# Altium PCB NewPCB.PcbDoc
Units mil, origin at the board's own origin, x right, y up, seen from the top; angles counter-clockwise.
Board outline 4705 x 2220 mil, 2 copper layers (Top Layer, Bottom Layer); 55 components, 74 nets, 194 pads, 36 vias.
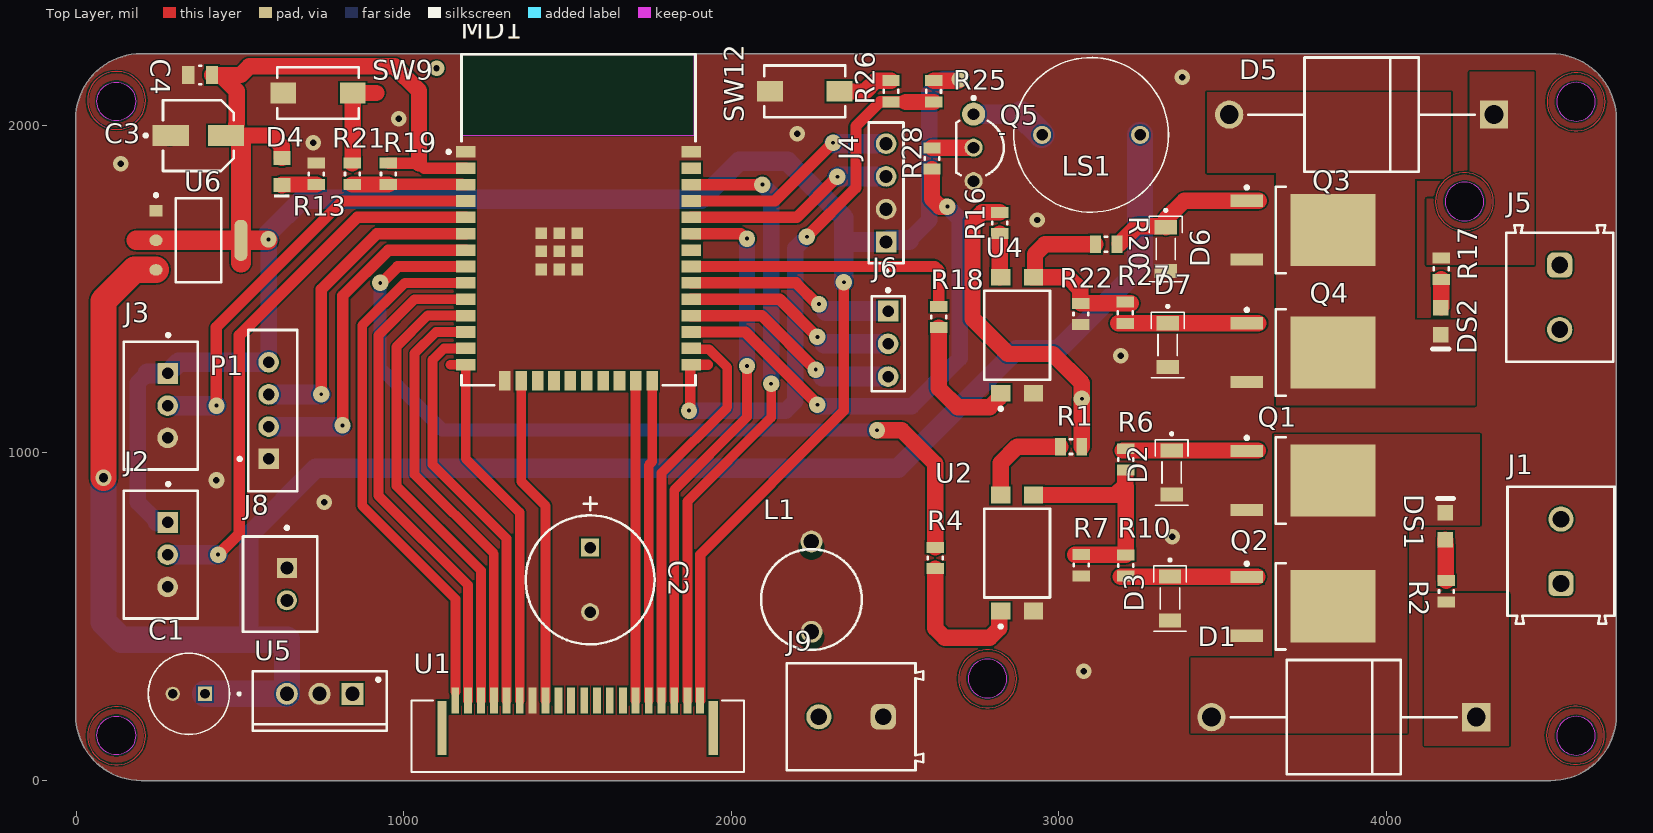
[diagram p0: Top Layer view]
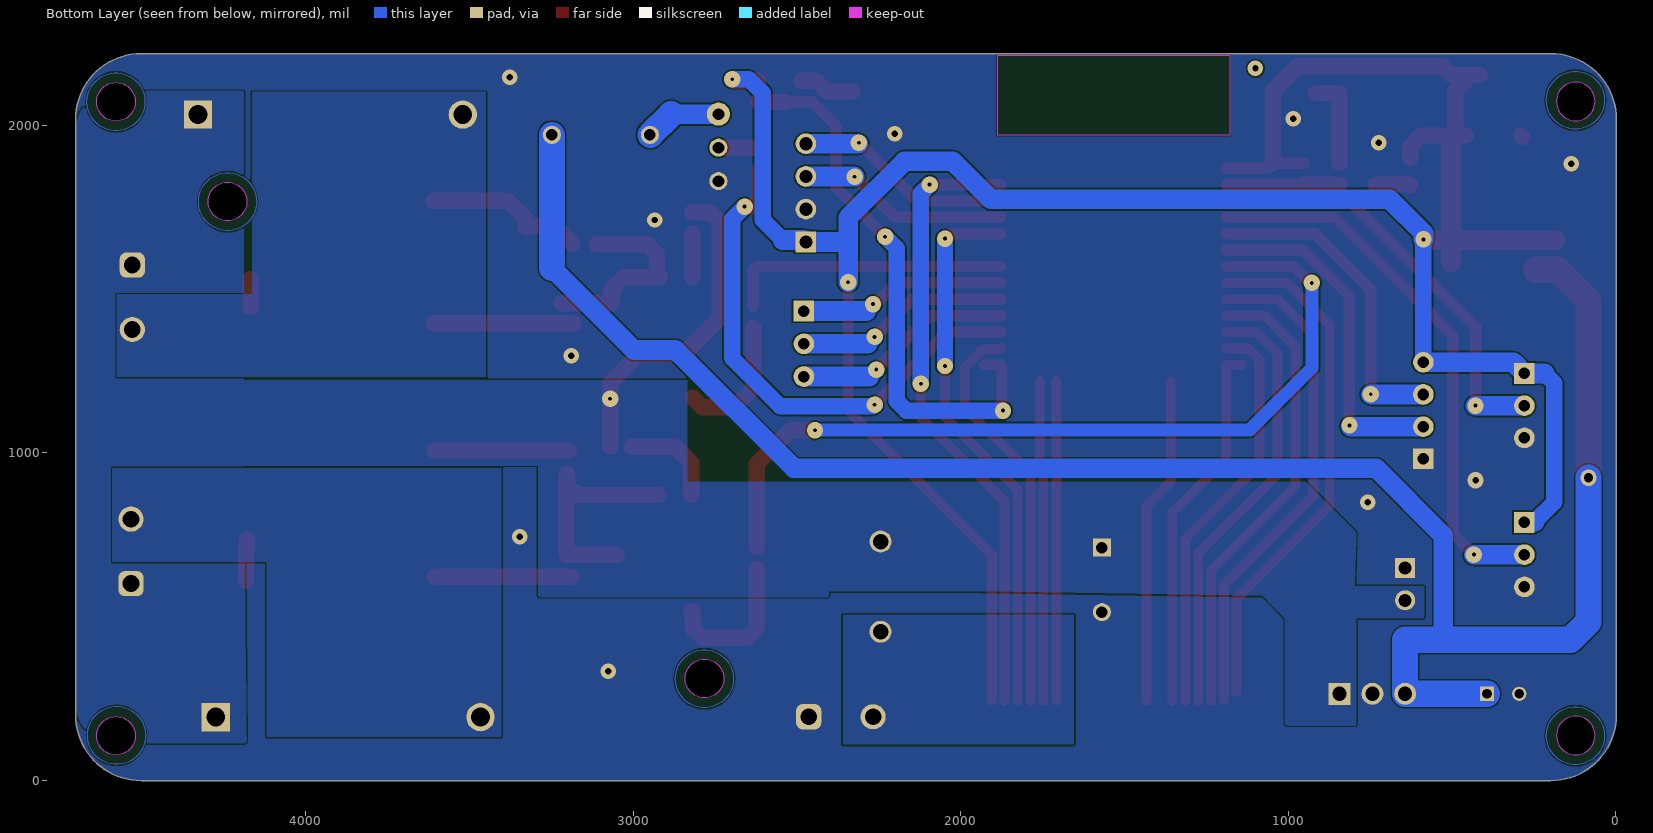
[diagram p1: Bottom Layer view, seen from below]

## Layer stack, top to bottom
Top Solder: solder mask 0.4, Solder Resist, Dk 3.5
Top Layer: signal copper 1.4
Dielectric 1: dielectric 12.6, FR-4, Dk 4.8
Bottom Layer: signal copper 1.4
Bottom Solder: solder mask 0.4, Solder Resist, Dk 3.5

## Board outline
198,-1 4503,-1 ccw(c4503,199) 4703,199 4703,2019 ccw(c4503,2019) 4503,2219 198,2219 ccw(c198,2019) -2,2019 -2,199 ccw(c198,199)
cut-out: 122,2013.94 cw(c122,2073) 62.94,2073 cw(c122,2073) 122,2132.06 cw(c122,2073) 181.06,2073 cw(c122,2073)
cut-out: 4520.96,136 ccw(c4580.02,136) 4580.02,76.94 ccw(c4580.02,136) 4639.07,136 ccw(c4580.02,136) 4580.02,195.06 ccw(c4580.02,136)
cut-out: 4520.94,2072 ccw(c4580,2072) 4580,2012.94 ccw(c4580,2072) 4639.06,2072 ccw(c4580,2072) 4580,2131.06 ccw(c4580,2072)
cut-out: 122,77.96 cw(c122,137.02) 62.94,137.02 cw(c122,137.02) 122,196.07 cw(c122,137.02) 181.06,137.02 cw(c122,137.02)
cut-out: 2723.6,310.65 ccw(c2782.65,310.65) 2782.65,251.6 ccw(c2782.65,310.65) 2841.71,310.65 ccw(c2782.65,310.65) 2782.65,369.71 ccw(c2782.65,310.65)
cut-out: 4180.29,1767.35 ccw(c4239.35,1767.35) 4239.35,1708.29 ccw(c4239.35,1767.35) 4298.4,1767.35 ccw(c4239.35,1767.35) 4239.35,1826.4 ccw(c4239.35,1767.35)

## Design rules (kind name [scope] priority, off if disabled: settings)
Clearance Clearance_1_1 [OnMid vs OnMid] p1: gap=5 ignorepadtopadclearanceinfootprint=FALSE sourcerule=38 cellrowname=All cellrowtype=0 cellcolname=All cellcoltype=0 innerlayers=TRUE
Clearance Clearance_1_2 [(ExistsOnLayer('Top Layer') Or ExistsOnLayer('Bottom Layer')) vs (ExistsOnLayer('Top Layer') Or ExistsOnLayer('Bottom Layer'))] p2: gap=5 ignorepadtopadclearanceinfootprint=FALSE sourcerule=38 cellrowname=All cellrowtype=0 cellcolname=All cellcoltype=0 outerlayers=TRUE
Clearance Clearance_1 [All] p3: gap=5 ignorepadtopadclearanceinfootprint=FALSE ismatrix=TRUE miname0="All Nets" mitype0=2
PlaneConnect [All] p1: planeconnectstyle=Direct reliefexpansion=20 reliefentries=4 reliefconductorwidth=10 reliefairgap=10
PolygonConnect [All] p1: connectstyle=Direct reliefconductorwidth=10 reliefentries=2 polygonreliefangle="90 Angle" airgapwidth=10
RoutingVias [All] p1: holewidth=28 width=50 viastyle="Through Hole" minholewidth=28 minwidth=50 maxholewidth=28 maxwidth=50
SolderMaskExpansion [All] p1: expansion=4 istentingtop=FALSE
UnRoutedNet [All] p1: checkbadconnections=TRUE
Width MaxMinWidth_3 [All] p1: maxlimit=80 minlimit=30 preferedwidth=50 minimp=50.000000 maximp=50.000000 favimp=50.000000
Width MaxMinWidth_1 [InNet('3v3')] p2: maxlimit=80 minlimit=30 preferedwidth=60 minimp=50.000000 maximp=50.000000 favimp=50.000000
Width [All] p3: maxlimit=10 minlimit=10 preferedwidth=10
28 further rules are at their usual default settings.

## Components (designator, comment, footprint, x,y, rotation, side; value= is the part's Value field where it differs from the comment)
C1 "100uF 16v" CAPPRD250W50D630H1120 343.79,264 r180 top
C2 "100uF_35v" PNSC-EEU-EE2G100-2_V 1569,612 r270 top
C3 "10uF" FP-SC-MFG 373,1969 r0 top
C4 "1uF_0805" FP-CC0805-0_85-MFG 378,2154 r180 top value="100 nF"
D1 "6A10-T" FP-R-6-MFG 3871,193 r180 top
D2 "BZV55C5V1" MINIMELF-2 3345,940 r270 top
D3 "BZV55C5V1" MINIMELF-2 3340,555 r270 top
D4 "Red_0805" WL-SMCW_0805_150080xx75000 628,1859 r90 top
D5 "6A10-T" FP-R-6-MFG 3925,2033 r180 top
D6 "BZV55C5V1" MINIMELF-2 3327,1622.13 r270 top
D7 "BZV55C5V1" MINIMELF-2 3333,1329 r270 top
DS1 "HSMG-C170" AVAG-HSMX-C170_V 4181,776 r90 top
DS2 "HSMG-C170" AVAG-HSMX-C170_V 4166.56,1402 r270 top
J1 "691213710002" 691213710002 4534,699 r90 top
J2 "M_Speed1" FP-B3B-XH-A_LF_SN-MFG 258,689 r270 top
J3 "M_Speed2" FP-B3B-XH-A_LF_SN-MFG 258,1144 r270 top
J4 "4x1_Female_Header" FP-2212S-04SG-85-MFG 2473,1794 r90 top
J5 "691213710002" 691213710002 4530,1475 r270 top
J6 "87224-3" FP-87224-3-MFG 2479,1333 r270 top
J8 "JST 2" FP-B2B-XH-A_LF_SN-MFG 622.33,598.82 r270 top
J9 "691213710002" 691213710002 2366,194 r180 top
L1 "744772331" WE-TI-L 2245,552 r90 top
LS1 "CMI-1275C-050" CUI_CMI-1275C-050 3099,1971 r180 top
MD1 "ESP32-WROOM-32D (8MB)" FP-ESP32-WROOM-32D_8MB-MFG 1533.51,1711.91 r0 top
P1 "Ball feeder" JST-B4B-EH-A_V 587.5,1129 r90 top
Q1 "NCE40H12K" INF-PG-TO252-3-313_N 3745.78,915.5 r0 top
Q2 "NCE40H12K" INF-PG-TO252-3-313_N 3745.78,531.25 r0 top
Q3 "NCE40H12K" INF-PG-TO252-3-313_N 3745.78,1680.25 r0 top
Q4 "NCE40H12K" INF-PG-TO252-3-313_N 3745.78,1306.25 r0 top
Q5 "BC547BZL1G" ONSC-TO-92-3-29-11_AM_BL 2740,1932 r270 top
R1 "3.3k" RESC2013X50X30LL20T20 3038,1019 r0 top
R2 "4.7k" RESC2013X50X30LL20T20 4184,577 r270 top
R4 "1k" RESC2013X50X30LL20T20 2623,679 r270 top
R6 "100" RESC2013X50X30LL20T20 3205,980 r90 top
R7 "10k" RESC2013X50X30LL20T20 3069,657 r90 top
R10 "100" RESC2013X50X30LL20T20 3205,656 r270 top
R13 "100" RESC2013X50X30LL20T20 733.09,1852 r270 top
R16 "3.3K" RESC2013X50X30LL20T20 2820,1702 r90 top
R17 "4.7k" RESC2013X50X30LL20T20 4168,1562 r90 top
R18 "1K" RESC2013X50X30LL20T20 2634,1415 r270 top
R19 "12k" RESC2013X50X30LL20T20 953,1852 r270 top
R20 "100" RESC2013X50X30LL20T20 3145,1637 r0 top
R21 "470" RESC2013X50X30LL20T20 843.05,1852 r270 top
R22 "10K" RESC2013X50X30LL20T20 3068,1424 r90 top
R25 "12k" RESC2013X50X30LL20T20 2618,2104 r270 top
R26 "470" RESC2013X50X30LL20T20 2488,2104 r270 top
R27 "100" RESC2013X50X30LL20T20 3203,1428 r270 top
R28 "220" RESC2013X50X30LL20T20 2613,1899 r90 top
SW9 "[3x6x2.5mm] SMD" FP-EVQ-PE105K-MFG 738,2099 r180 top
SW12 "[3x6x2.5mm] SMD" FP-EVQ-PE105K-MFG 2224.3,2104 r180 top
U1 "SFW20R-2STE1LF" FCI_SFW20R-2STE1LF 1531,352 r180 top
U2 "LTV-817S" LTST-LTV-817S-4_V 2873,694 r90 top
U4 "LTV-817S" LTST-LTV-817S-4_V 2873,1359 r90 top
U5 "L7812CV" TO220 743,264 r180 top
U6 "AMS1117-3.3" FP-AMS1117-IPC_C 373,1649 r0 top

## Footprints (in the part's own frame and the unit in brackets; to place one, negate y for a bottom-side part, rotate by r counter-clockwise, add the part's x,y. Pads: shape width x height; smd on the part's side, far side on the other; paste and mask are expansions set on the pad)
691213710002 [mm] "5,00mm - modular - green - Horizontal entry with rising cage clamp -  10,0mm height - 02p"
  rrect50% 1.95x1.95 hole 1.3: 1(-2.5,0)
  round 1.95 hole 1.3: 2(2.5,0)
  silkscreen extent -5.6,-4.15 5,4.15, body extent -5.6,-4.15 5,4.15, height 10.05
AVAG-HSMX-C170_V [mm] "SMD, 2-Leads, Body 2x1.25mm, Height 0.8mm"
  rect 1.2x1.2 smd: 1(-1.05,0) 2(1.05,0)
  silkscreen extent 2.15,-0.63 2.15,0.63, body extent -1,-0.63 1,0.63, height 0.8
CAPPRD250W50D630H1120 [mm]
  round 1.1 hole 0.75: N(1.25,0)
  rect 1.1x1.1 hole 0.75: P(-1.25,0)
  silkscreen extent -4,-3.15 3.15,3.15, body extent -3.15,-3.15 3.15,3.15, height 11.2
CUI_CMI-1275C-050 [mm]
  round 1.408 hole 0.9: N(3.8,0) P(-3.8,0)
  silkscreen extent -6,-6 6,6
FCI_SFW20R-2STE1LF [mil]
  rect 24x79 smd: 1(374,108) 2(335,108) 3(295,108) 4(256,108) 5(217,108) 6(177,108) 7(138,108) 8(98,108) 9(59,108) 10(20,108) 11(-20,108) 12(-59,108) 13(-98,108) 14(-138,108) 15(-177,108) 16(-217,108) 17(-256,108) 18(-295,108) 19(-335,108) 20(-374,108)
  rect 28x165 smd: 21(-414,192) 22(414,192)
  silkscreen extent -508,108 508,326
FP-2212S-04SG-85-MFG [mm]
  rect 1.6x1.6 hole 1.02 paste-2539.97 mask+0: 1(-3.81,0)
  round 1.6 hole 1.02 paste-2539.97 mask+0: 2(-1.27,0) 3(1.27,0) 4(3.81,0)
  silkscreen extent -6.18,-1.35 5.46,1.35, body extent -5.56,-1.45 5.56,1.45, height 0.25
FP-87224-3-MFG [mm]
  rect 1.6x1.6 hole 0.889 paste-2539.97 mask+0: 1(-2.54,0)
  round 1.6 hole 0.889 paste-2539.97 mask+0: 2(0,0) 3(2.54,0)
  silkscreen extent -4.27,-1.27 3.67,1.27, body extent -3.77,-1.37 3.77,1.37, height 0.25
FP-AMS1117-IPC_C [mm]
  rect 1.004x0.872 smd paste+0 mask+0: 1(-3.295,2.29)
  rrect100% 1.004x0.872 smd paste+0 mask+0: 2(-3.295,0) 3(-3.295,-2.29)
  rrect87% 1.004x3.182 smd paste+0 mask+0: 4(3.295,0)
  silkscreen extent -3.42,-3.25 1.75,3.62, body extent -3.9,-3.35 3.9,3.35, height 0.25
FP-B2B-XH-A_LF_SN-MFG [mm]
  rect 1.55x1.55 hole 1 paste-2539.97 mask+0: 1(-1.25,0.525)
  round 1.55 hole 1 paste-2539.97 mask+0: 2(1.25,0.525)
  silkscreen extent -4.5,-2.88 3.7,2.88, body extent -3.8,-2.98 3.8,2.98, height 0.25
FP-B3B-XH-A_LF_SN-MFG [mm]
  rect 1.6x1.6 hole 0.9 paste-2539.97 mask+0: 1(-2.5,0.525)
  round 1.6 hole 0.9 paste-2539.97 mask+0: 2(0,0.525) 3(2.5,0.525)
  silkscreen extent -5.6,-2.88 4.95,2.88, body extent -5.05,-2.98 5.05,2.98, height 0.25
FP-CC0805-0_85-MFG [mm]
  rect 0.95x1.4 smd paste+0 mask+0: 1(-0.925,0) 2(0.925,0)
  silkscreen extent -0.08,-0.72 0.08,0.72, body extent -1.6,-1.05 1.6,1.05, height 0.25
FP-ESP32-WROOM-32D_8MB-MFG [mm]
  rect 1.5x0.9 smd paste+0 mask+0: 1(-8.75,5.26) 2(-8.75,3.99) 3(-8.75,2.72) 4(-8.75,1.45) 5(-8.75,0.18) 6(-8.75,-1.09) 7(-8.75,-2.36) 8(-8.75,-3.63) 9(-8.75,-4.9) 10(-8.75,-6.17) 11(-8.75,-7.44) 12(-8.75,-8.71) 13(-8.75,-9.98) 14(-8.75,-11.25) 25(8.75,-11.25) 26(8.75,-9.98) 27(8.75,-8.71) 28(8.75,-7.44) 29(8.75,-6.17) 30(8.75,-4.9) 31(8.75,-3.63) 32(8.75,-2.36) 33(8.75,-1.09) 34(8.75,0.18) 35(8.75,1.45) 36(8.75,2.72) 37(8.75,3.99) 38(8.75,5.26)
  rect 0.9x1.5 smd paste+0 mask+0: 15(-5.71,-12.5) 16(-4.44,-12.5) 17(-3.17,-12.5) 18(-1.9,-12.5) 19(-0.63,-12.5) 20(0.64,-12.5) 21(1.91,-12.5) 22(3.18,-12.5) 23(4.45,-12.5) 24(5.72,-12.5)
  rect 0.9x0.9 smd paste+0 mask+0: 39(-2.9,-3.86) 39(-2.9,-2.46) 39(-2.9,-1.06) 39(-1.5,-3.86) 39(-1.5,-2.46) 39(-1.5,-1.06) 39(-0.1,-3.86) 39(-0.1,-2.46) 39(-0.1,-1.06)
  Keep-Out Layer region: -9,6.56 9,6.56 9,12.75 -9,12.75
  Keep-Out Layer region: -9,6.56 9,6.56 9,12.75 -9,12.75
  silkscreen extent -10.2,-12.83 9.08,12.83, body extent -9.6,-13.35 9.6,12.93, height 0.25
FP-EVQ-PE105K-MFG [mm]
  rect 2x1.6 smd paste+0 mask+0: A(-2.7,0) B(2.7,0)
  silkscreen extent -3.15,-2 3.15,2, body extent -3.8,-2.1 3.8,2.1, height 0.25
FP-R-6-MFG [mm]
  rect 2.2x2.2 hole 1.45 paste-2539.97 mask+0: 1(-10.27,0)
  round 2.2 hole 1.45 paste-2539.97 mask+0: 2(10.27,0)
  silkscreen extent -8.77,-4.43 8.77,4.43, body extent -11.47,-4.65 11.47,4.65, height 0.25
FP-SC-MFG [mm]
  rect 2.8x1.6 smd paste+0 mask+0: 1(-2.15,0) 2(2.15,0)
  silkscreen extent -4.22,-2.75 2.75,2.75, body extent -3.8,-3 3.8,3, height 0.25
INF-PG-TO252-3-313_N [mm] "DPAK, 3-Leads, Body 6.5x6.12mm, Pitch 2.28mm, IPC Medium Density"
  rect 2.55x0.95 smd: 1(-4.35,2.28) 3(-4.35,-2.28)
  rect 6.6x5.6 smd: 2(2.35,0)
  silkscreen extent -4.47,-3.35 -1.35,3.43, body extent -2.1,-3.32 4.12,3.32, height 2.35
JST-B4B-EH-A_V [mm] "Header, 4-Leads, Body 12.5x3.8mm, Pitch 2.5mm"
  rect 1.6x1.6 hole 0.9: 1(-3.75,0)
  round 1.6 hole 0.9: 2(-1.25,0) 3(1.25,0) 4(3.75,0)
  silkscreen extent -6.25,-2.2 6.25,2.37, body extent -6.25,-2.2 6.25,1.6, height 6
LTST-LTV-817S-4_V [mm] "SMD, 4-Leads, Body 7x5.1mm, Pitch 2.54mm"
  rect 1.3x1.5 smd: 1(-4.5,1.27) 2(-4.5,-1.27) 3(4.5,-1.27) 4(4.5,1.27)
  silkscreen extent -5.82,-2.55 3.45,2.55, body extent -3.5,-2.55 3.5,2.55, height 4.4
MINIMELF-2 [mm]
  rect 1.11x1.73 smd: A(1.705,0) C(-1.705,0)
  silkscreen extent -3.1,-1.27 2.54,1.27
ONSC-TO-92-3-29-11_AM_BL [mm] "TO, 3-Leads, Body Dia 4.7mm, Pitch 2.6mm"
  round 1.8 hole 0.9: 1(-2.6,0)
  round 1.4 hole 0.9: 2(0,0) 3(2.6,0)
  silkscreen extent -3.97,-1.34 2.13,2.35, body extent -2.84,-1.34 2.84,2.35, height 5.33
PNSC-EEU-EE2G100-2_V [mm] "Through-hole, 2-Leads, Base 10x10mm, Height 22mm"
  rect 1.4x1.4 hole 0.9: 1(-2.5,0)
  round 1.4 hole 0.9: 2(2.5,0)
  silkscreen extent -6.4,-5 5,5, body extent -5,-5 5,5, height 22
RESC2013X50X30LL20T20 [mm] "Chip Resistor, 2-Leads, Body 2.00x1.25mm, IPC High Density"
  rect 0.85x1.35 smd: 1(-0.825,0) 2(0.825,0)
  silkscreen extent -0.1,-0.58 0.1,0.58, body extent -1.1,-0.72 1.1,0.72, height 0.5
TO220 [mm] "TO, Thru-Hole, Vertical, Heatsink Mounted; 3 In-Line Leads; Pitch 2.54 mm"
  rect 1.7x1.7 hole 1.1: 1(-2.54,0)
  round 1.7 hole 1.1: 2(0,0) 3(2.54,0)
  silkscreen extent -5.2,-1.75 5.2,2.85, body extent -5.25,-1.8 5.25,2.9, height 19.7
WE-TI-L [mm] "THT Inductor, 2-Leads, Body 8,0  mm"
  round 1.7 hole 1.2: 1(-2.5,0) 2(4.5,0)
  silkscreen extent -3.9,-3.9 3.9,3.9, body extent -3.9,-3.9 3.89,3.9, height 9.5
WL-SMCW_0805_150080xx75000 [mm] "SMD Mono-color Chip LED, body 2.0x1.25mm"
  rect 1.1x1.3 smd: 1(-1.05,0) 2(1.05,0)
  silkscreen extent -2,-0.6 -1.8,0.6, body extent -1,-0.63 1,0.62, height 0.7

## Part data
C1: library part EEUFC1C101H, "Cap Aluminum Lytic 100uF 16V 20% (6.3 X 11.2mm) Radial 2.5mm 290mA 1000h 105C Automotive Ammo", Package="RADIAL-2 Panasonic", Availability="In Stock", Check_prices=https://www.snapeda.com/parts/EEU-FC1C101H/Panasonic/view-part/2305507/?ref=eda, MF=Panasonic, MP=EEU-FC1C101H, Price=None, Purchase-URL=https://pricing.snapeda.com/search/part/EEU-FC1C101H/?ref=eda, SnapEDA_Link=https://www.snapeda.com/parts/EEU-FC1C101H/Panasonic/view-part/2305507/?ref=snap
C2: library part CMP-0736-00002-1, "Aluminum Electrolytic Capacitor, 10 uF +/- 20%, 400 V, -25 to 105 degC, 2-Pin 10 x 10 x 22 mm Through-hole, RoHS, Tape and Reel", Capacitance Tolerance="+/- 20%", Manufacturer=Panasonic, PartNumber=EEU-EE2G100, Rated Voltage="400 V", Ripple Current="430 mA", Temp. Range="-25 to 105 degC", Cap.="10 uF", ComponentLink1Description="Manufacturer URL", ComponentLink1URL=http://industrial.panasonic.com/, ComponentLink2Description=Datasheet, ComponentLink2URL=http://industrial.panasonic.com/www-data/pdf/ABA0000/ABA0000CE113.pdf, ComponentLink3Description="Package Specification", ComponentLink3URL=http://industrial.panasonic.com/www-data/pdf/ABA0000/ABA0000PE245.pdf, DatasheetVersion=Nov-12, Mounting Technology="Through Hole", PackageDescription="2-Pin Through-hole, Base 10 x 10 mm, Height 22 mm", PackageReference=EEU-EE2G100-2, PackageVersion=Nov-12, Packing="Tape and Reel", RoHS=TRUE
C3: library part CMP-05427-000087-1, "CAP ALUM 10UF 20% 35V SMD", Case/Package=Radial, Leakage Current=3uA, Max Operating Temperature=85°C, Min Operating Temperature=-40°C, Package Quantity=1, Ripple Current=30mA, Tolerance=20%, Voltage=35V, Capacitance=10uF, Construction=Cylindrical, Contact Plating=Tin, Diameter=5mm, Height=5.4mm, Height - Seated (Max)=0.213inch, Lead Length=2.2mm, Lead Pitch=1.5mm, Length=5.5mm, Life (Hours)=2000Hour, Mount="Surface Mount", Number of Pins=2, Packaging="Tape and Reel", Radiation Hardening=No, REACH SVHC="No SVHC", Ripple Current (AC)=30mA, RoHS Compliant=Yes, Series=S, Termination=SMD/SMT, Voltage Rating=35V, Voltage Rating (DC)=35V, Width=5.3mm
C4: library part CMP-2100-03606-3, "CAP CER 0.1UF 50V X7R 0805", Capacitance="100 nF", Manufacturer=Yageo, Manufacturer Part Number=CC0805KRX7R9BB104, Package=CC0805-0.85, Temperature="-30°C to +85°C", Temperature Characteristic=X7R, Temperature Range High=+85°C, Temperature Range Low=-30°C, Tolerance=0.1, Voltage Rating="50 V", Automotive=No, Category=Cap, ComponentLink2Description=Datasheet, ComponentLink2URL=http://www.yageo.com/documents/recent/UPY-GPHC_Y5V_6.3V-to-50V_8.pdf, Device Class L1="Passive Components", Device Class L2=Capacitors, Device Class L3="Ceramic Capacitors", Digikey Description="CAP CER 0.1UF 50V X7R 0805", Footprint Url=http://www.yageo.com/exep/pages/download/literatures/UPY-C_GEN_24.pdf, Height=0.95mm, Ipc Land Pattern Name=CAPC200125X85, Lead Free=Yes, Material=Ceramic, Mouser Description="Multilayer Ceramic Capacitors MLCC - SMD/SMT 100nF 50V X7R 10%", Octopart=https://octopart.com/cc0805krx7r9bb104-yageo-192993, RoHS=TRUE
D1 D5: library part CMP-12791-000038-1, "DIODE GEN PURP 1KV 6A R6", Forward Current=6A, Manufacturer="Diodes Inc.", Max Junction Temp=+175°C, Max Repetitive Reverse Voltage=1000V, Max Surge Forward Current=400A, Package=R-6, Peak Reverse Current=10uA, Temperature="-65°C to +175°C", Temperature Range Low=-65°C, Automotive=No, Category=Diode, ComponentLink2Description=Datasheet, ComponentLink2URL=https://www.diodes.com/assets/Datasheets/ds28009.pdf, Device Class L1="Discrete Semiconductors", Device Class L2=Diodes, Device Class L3="Rectifier Diodes", Digikey Description="DIODE GEN PURP 1KV 6A R6", Footprint Url=https://www.diodes.com/assets/Package-Files/R-6.pdf, Height=9.1mm, Ipc Land Pattern Name=DIOAD2054W145L885D885, Lead Free=Yes, Manufacturer Part Number=6A10-T, Mouser Description="Rectifiers 1000V 6A", Octopart=https://octopart.com/6a10-t-diodes+inc.-55426548, Reverse Voltage=1000V, RoHS=TRUE, Temperature Range High=+175°C
D2 D3 D6 D7: "Zener Diode 5.1 V 500 mW Â±5% Surface Mount LLDS; MiniMelf", Package="SOD-80 Nexperia USA", Check_prices=https://www.snapeda.com/parts/BZV55-C5V1/Nexperia/view-part/?ref=eda, MF="Nexperia USA", MP=BZV55-C5V1, SnapEDA_Link=https://www.snapeda.com/parts/BZV55-C5V1/Nexperia/view-part/?ref=snap
D4: library part CMP-1426-00011-2, Case Code (Imperial)=0805, Case Code (Metric)=2012, Color=Red, Forward Current=100mA, Forward Voltage=2V, Max Operating Temperature=85°C, Max Reverse Voltage (DC)=5V, Min Operating Temperature=-40°C, Test Current=20mA, Case/Package=0805, Dominant Wavelength=625nm, Height=700µm, Length=2mm, Lens Style="Clear, Rectangular", Luminous Intensity=150mcd, Mount="Surface Mount", NexarPartId=29717781, Packaging="Tape and Reel", Peak Wavelength=630nm, REACH SVHC=Unknown, RoHS=Compliant, Viewing Angle=140°, Wavelength=625nm, Width=1.25mm
DS1 DS2: library part CMP-2000-05062-1, "Chip LED, Green, 2.2 V, -40 to 85 degC, 2-Pin SMD, Pb-Free, Tape and Reel", Forward Current If=20mA, Forward Voltage=2.2V, Forward Voltage VF Max=2.6V, LED Colour=Green, Manufacturer=Avago, Operating Temperature Max=85degC, Operating Temperature Min=-30degC, Operating Temperature Range=-30degCto+85degC, Opto Case Style=SMD, Package Description="2-Pin Surface Mount Device, Body 2 x 1.25 mm, Height 0.8 mm", Package Reference=HSMX-C170, Storage Temperature Min=-40degC, Bulb Size=1.25mmx1.4mm, Datasheet URL=https://datasheet.ciiva.com/29280/180495-da-01-en-chip-led-hsmg-c170-gelb-gruen-29280971.pdf, Datasheet Version=Oct-08, Dominant Wavelength=572nm, Dominant Wavelength Typ=572nm, External Depth=0.8mm, External Length / Height=2mm, External Width=1.25mm, Forward Current If Max=20mA, LED Mounting=SMD, LED Type=Standard, Lens Shape=Rectangular, Light Area Height=1mm, Luminous Intensity=15mcd, Luminous Intensity Min=4mcd, Luminous Intensity Typ=15mcd, Manufacturer URL=http://www.avagotech.com/, Mounting Type=SMD, MSL=MSL2A-4weeks, No. of Pins=2, Opto Mounting Orientation=Top, Packaging=CutTape, Peak Forward Current=20mA, Peak Wavelength=570nm, PIV Max=5V, Storage Temperature Max=85degC, SVHC=NoSVHC(16-Jun-2014), Viewing Angle=170deg, Voltage Vf Typ=2.2V, Wavelength Typ=570nm
J1 J5 J9: library part CMP-1502-02526-2, Color=Green, Current=10A, Max Operating Temperature=105°C, Min Operating Temperature=-40°C, Voltage=300V, Contact Material=Brass, Contact Plating=Tin, Current Rating=10A, Height=10mm, Housing Material=Nylon, Lead Pitch=5mm, Length=8.3mm, Mount="Through Hole", NexarPartId=8917718, Number of contacts=2, Number of Levels=1, Number of Pins=2, Number of Positions Per Level=2, Packaging=Box, Pitch=5.0038mm, Plating="Brass, Steel", REACH SVHC=Unknown, RoHS=Compliant, Stripping Length=-7mm, Termination=Screw, Voltage Rating=300V, Width=10.6mm, Wire Gauge (Max)=26AWG, Wire Gauge (Min)=16AWG, Wire/Cable Gauge=26AWG
J2 J3: library part CMP-17439-000014-3, "CONN HEADER VERT 3POS 2.5MM", Color=Natural, Contact Resistance=20mR, Current Rating=3A, Flammability Rating="UL94 V-0", Housing Color=White, Insulation Resistance=1GR, Max Operating Temperature=85°C, Max Voltage Rating (AC)=250V, Min Operating Temperature=-25°C, Connector Type=Header, Contact Finish - Mating=TIN, Contact Material=Brass, Contact Plating=Tin, Contact Shape=Square, Contact Type="Male Pin", Depth=5.75mm, Fastening Type=Detent, Gender=Male, Housing Material=Polyamide, Insulation Color=Natural, Insulation Material=Nylon, Lead Free="Lead Free", Lead Pitch=2.5mm, Length=9.9mm, Max Current Rating=3A, Max Voltage Rating (DC)=250V, Mount="Through Hole", Number of contacts=3, Number of Positions=3, Number of Rows=1, Orientation=Straight, Packaging=Bulk, Pitch=2.5mm, REACH SVHC="No SVHC", Series=XH, Termination=Solder, Voltage Rating=250V, Voltage Rating (AC)=250V, Wire/Cable Gauge=22AWG
J4: library part CMP-12414-000003-1, "Header, Rectangular, 4 Positions, 2.54mm Pitch, Receptacle, Vertical, Through-Hole", Flammability Rating="UL94 V-0", Insulation Resistance=1GR, Contact Material=Bronze, Contact Plating=Gold, Gender=Receptacle, Height=0.35inch, Length=0.43inch, Mount="Through Hole", Number of contacts=4, Number of Rows=1, REACH SVHC="No SVHC", RoHS Compliant=Yes, Termination="Through Hole", Weight=0.11lb, Width=0.12inch
J6: library part CMP-2000-05697-2, "CONN HEADER VERT 3POS 2.54MM", Color=Black, Contact Current Rating=3A, Flammability Rating="UL94 V-0", High Temperature Housing=No, Max Operating Temperature=105°C, Min Operating Temperature=-65°C, Package Quantity=520, Approvals=CSA, Board Standoff="No (Without)", Connector Type=Plug, Contact Gender=Male, Contact Material=Bronze, Contact Mating Length=8.08mm, Contact Plating=Gold, Contact Post Length=0.125inch, Contact Protection="No (Without)", Contact Shape=Square, Contact Type="Male Pin", Current Rating=3A, Depth=2.54mm, ELV=Compliant, Gasket="No (Without)", High Speed Serial Data Connector=No, Housing Color=Black, Housing Material=Thermoplastic, Keyed=No, Lead Free="Lead Free", Length=7.21mm, Mating Alignment="No (Without)", Mating Connector Lock="No (Without)", Mount="Through Hole", Number of contacts=3, Number of Positions=3, Number of Rows=1, Orientation=Straight, Packaging=Carton, PCB Mount Retention=Without, PCB Mounting Orientation=Vertical, PCB Thickness=1.397mm, Pitch=2.54mm, Radiation Hardening=No, RoHS Compliant=Yes, Row Spacing=2.54mm, Selectively Loaded="No (Without)", Series="AMPMODU MOD II", Stabilizers="No (Without)", Strain Relief="No (Without)", Termination="Through Hole"
J8: library part CMP-2000-05888-3, "CONN HEADER VERT 2POS 2.5MM", Color=Natural, Contact Resistance=20mR, Current Rating=3A, Housing Color=White, Insulation Resistance=1GR, Max Operating Temperature=85°C, Max Voltage Rating (AC)=250V, Min Operating Temperature=-25°C, Connector Type="Male Pin", Contact Material=Brass, Contact Plating=Tin, Contact Type="Male Pin", Depth=5.75mm, Fastening Type=Detent, Housing Material=Polyamide, Lead Free="Lead Free", Lead Pitch=2.5mm, Length=7.4mm, Max Current Rating=3A, Max Voltage Rating (DC)=250V, Mount="Through Hole", Number of contacts=2, Number of Positions=2, Number of Rows=1, Orientation=Straight, Packaging=Bulk, Pitch=2.5mm, REACH SVHC="No SVHC", Series=XH, Termination=Solder, Voltage Rating=250V, Voltage Rating (AC)=250V, Wire/Cable Gauge=22AWG
L1: library part CMP-1405-00029-1, "Radial Leaded Wire Wound Inductor WE-TI, L=330 µH", Inductance="330 ÂµH", Manufacturer="Wuerth Elektronik", ComponentLink1Description="Manufacturer URL", ComponentLink1URL=http://www.we-online.com, ComponentLink2Description=Datasheet, ComponentLink2URL=http://www.we-online.de/katalog/media/pdf/744772331.pdf, PackageDescription="THT Inductor, 2-Leads, Body 7.8 x 7.8 mm", PackageReference=WE-TI-L, PartNumber=744772331
LS1: "12 mm, 5 Vdc, 90 dB, 3.1 kHz, Through Hole, Magnetic Audio Indicator Buzzer", Package="TO-220 CUI Inc.", Availability=Unavailable, CUI_purchase_URL=https://www.cuidevices.com/product/audio/buzzers/audio-indicators/cmi-1275c-050?utm_source=snapeda.com&utm_medium=referral&utm_campaign=snapedaBOM, DigiKey-Purchase-URL=https://snapeda.com/shop?store=DigiKey&id=2772244, MF="CUI Devices", Mouser-Purchase-URL=https://snapeda.com/shop?store=Mouser&id=2772244, MP=CMI-1275C-050, Price=None, SnapEDA_Link=https://www.snapeda.com/parts/CMI-1275C-050/CUI%20Devices/view-part/2772244/?ref=snap
MD1: library part CMP-194065-000011-1, "RX TXRX MOD WIFI TRACE ANT SMD", Case/Package=SMD/SMT, Frequency=2.5GHz, Max Operating Temperature=85°C, Min Operating Temperature=-40°C, Data Rate=150Mbps, Interface=I2C, Memory Size=536KB, Mount="Surface Mount", Packaging="Tape and Reel", Sensitivity=-98dBm
P1: library part CMP-2000-05904-1, "Male Header, Pitch 2.5 mm, 1 x 4 Position, Height 6 mm, Tail Length 3.2 mm, -25 to 85 degC, RoHS, Bulk", Manufacturer=JST, Package Description="Male Header, Pitch 2.5 mm, 1 x 4 Position, Height 6 mm, Tail Length 3.2 mm", Package Reference=B4B-EH-A, Datasheet URL=http://www.jst-mfg.com/product/pdf/eng/eEH.pdf, Datasheet Version=12/2012, Manufacturer URL=http://www.jst.com/home2.html, Mounting Technology=SurfaceMount, No of Positions=4, Pitch=2.5mm, Style/Orientation=StraightHeader/Plug, Termination=Crimp, Type=ShroudedHeader
Q1 Q2 Q3 Q4: library part CMP-1164-00353-1, "N-Channel CoolMOS C6 Power-Transistor, 600 V VDS, 8.1 A ID, -55 to 150 degC, PG-TO252-3-313, Reel, Green", Manufacturer=Infineon, PartNumber=IPD60R520C6, ComponentLink1Description="Manufacturer URL", ComponentLink1URL=http://www.infineon.com/, ComponentLink2Description=Datasheet, ComponentLink2URL=http://www.infineon.com/dgdl/IPD60R520C6_2.0.pdf?folderId=db3a3043163797a6011638933eda014b&fileId=db3a304323b87bc20123e676d18358fb, ComponentLink3Description="Package Specification", ComponentLink3URL=http://www.infineon.com/dgdl/PG-TO252-3-313-Package_Overview.pdf?folderId=db3a30432b57a660012b81890ade72d2&fileId=db3a30432b57a660012b8193af2872eb, DatasheetVersion="Rev. 2.0", Green=TRUE, ID (max)="8.1Â A", IDpuls (max)="22Â A", Mounting Technology="Surface Mount", PackageDescription="3-Pin Plastic (Green) Transistor Single Outline Package, 6.5 x 6.12 mm Body, 2.28 mm Pitch", PackageReference=PG-TO252-3-313, PackageVersion=Oct-10, Packing=Reel, Polarity=N, Ptot (max)="66Â W", QG="23.4Â nC", RDS (on) (max)="520Â mOhm", Rth="1.9Â K/W", RthJA (max)="62Â K/W", RthJC (max)="1.9Â K/W", Technology="CoolMOS C6", VDS (max)="600Â V", VGS(th) (max)="3.5Â V", VGS(th) (min)="2.5Â V"
Q5: library part CMP-1048-01604-1, "Amplifier Transistor, NPN Silicon, 3-Pin TO-92, Pb-Free, Ammo Box", Manufacturer="On Semiconductor", ComponentLink1Description="Manufacturer URL", ComponentLink1URL=http://www.onsemi.com/, ComponentLink2Description=Datasheet, ComponentLink2URL=http://www.onsemi.com/pub_link/Collateral/BC546-D.PDF, ComponentLink3Description="Package Specification", ComponentLink3URL=http://www.onsemi.com/pub_link/Collateral/MAC97-D.PDF, DatasheetVersion="Rev. 7", fT Min (MHz)=150, IC Continuous (A)=0.1, Mounting Technology="Through Hole", PackageDescription="3-Pin Transistor Outline, Body 4.825 x 3.685 mm, Pitch 1.27 mm", PackageReference=TO-92-3-29-11_AM_BL, PackageVersion="Rev. AM", Packing="Ammo Box", PartNumber=BC547BZL1G, Polarity=NPN, RoHS=TRUE
R1 R2 R4 R6 R7 R10 R13 R16 R17 R18 R19 R20 R21 R22 R25 R26 R27 R28: library part CMP-2001-04896-1, Manufacturer="Vishay Dale", Part Number=CRCW08050000Z0EA
SW9 SW12: library part CMP-00287-39857596-1, "EVQ-PE105K Switch Tactile N.O. SPST Rectangular Button J-Bend 0.05A 12VDC 1N SMD Embossed Tape", Color=Black, Contact Current Rating=50mA, Contact Resistance=100mΩ, Max Operating Temperature=85°C, Max Voltage Rating (DC)=12V, Min Operating Temperature=-30°C, Operating Force=1N, Actuator Length=1.5mm, Contact Plating="Gold, Silver", Current Rating=50mA, Depth=7.2mm, Electrical Life=50kcycles, Height=5mm, Illumination Type="Illuminated, Non-Illuminated", Lead Free="Lead Free", Length=6mm, Max Current Rating=50mA, Mechanical Life=50kcycles, Mount="Surface Mount", NexarPartId=39857596, Number of Positions=2, Orientation=Straight, Radiation Hardening=No, REACH SVHC="No SVHC", RoHS=Compliant, Switch Function=Off-Mom, Switch Travel=250µm, Termination="Gull Wing", Throw Configuration=SPST, Voltage Rating (DC)=12V, Width=3.5mm
U1: library part CMP-008-000000-1, "FFC/FPC CONNECTOR, RECEPTACLE 20POS 1ROW", Package=None, Availability=Unavailable, Component Type=Standard, Design Item ID=SFW20R-2STE1LF, MP=SFW20R-2STE1LF, Pin Count=20, Price=None, Source=SFW20R-2STE1LF.SchLib
U2 U4: library part CMP-2000-05204-1, "Photocoupler - Phototransistor Output, 35 V VCEO, -50 to 110 degC, 4-Pin SMD, RoHS, Tape and Reel", Collector Current (DC)=0.05A, Collector-Emitter Saturation Voltage=0.2V, Collector-Emitter Voltage=35V, Current Transfer Ratio=600%, Forward Current=50mA, Forward Voltage=1.4V, Isolation Voltage=5000V, Manufacturer=Lite-On, Operating Temp Range=-30Cto100C, Operating Temperature Classification=Commercial, Package Type=PDIPSMD, Power Dissipation=0.2W, Reverse Breakdown Voltage=6V, Collector Current (DC) (Max)=0.05A, Datasheet URL=https://datasheet.ciiva.com/15118/getdatasheetpartid-147501-15118828.pdf, Datasheet Version=Jan-10, DELETED=Compliant, Fall Time=18000ns, Input Type=DC, Manufacturer URL=http://www.us.liteon.com/, Mounting=SurfaceMount, Number of Elements=1, Output Device=Transistor, Output Type=DC, Pin Count=4, Rad Hardened=No, Rise Time=18000ns
U5: library part CMP-0244-00450-1, "Positive Voltage Regulator, 12V, 3-Pin TO-220", ComponentLink1Description="Manufacturer URL", ComponentLink1URL=http://www.st.com, ComponentLink2Description=Datasheet, ComponentLink2URL=http://www.st.com/internet/com/TECHNICAL_RESOURCES/TECHNICAL_LITERATURE/DATASHEET/CD00000444.pdf, ComponentLink3Description="Package Specification", ComponentLink3URL=http://www.st.com/internet/com/TECHNICAL_RESOURCES/TECHNICAL_LITERATURE/PACKAGE_INFORMATION/CD00004649.pdf, DatasheetVersion=16/11/2011, PackageDescription="TO, Thru-Hole, Vertical, Heatsink Mounted; 3 In-Line Leads; Pitch 2.54 mm", PackageReference=TO220, PackageVersion=ver3.0
U6: library part CMP-209535-000001-1, "LDO Voltage Regulators 1A, 3.3V", Dropout Voltage=1.1V, Manufacturer="Advanced Monolithic Systems", Max Junction Temp=+125°C, Max Power Dissipation=1.2W, Max Supply Voltage=15V, Nominal Supply Current=5mA, Output Current=1A, Output Voltage=3.3V, Package=AMS1117, Temperature="-40°C to +125°C", Temperature Range Low=-40°C, Automotive=No, Category=IC, ComponentLink2Description=Datasheet, ComponentLink2URL=http://www.advanced-monolithic.com/pdf/ds1117.pdf, Device Class L1="Integrated Circuits (ICs)", Device Class L2="Power Management ICs", Device Class L3="Voltage Regulators - Linear", Height=1.8mm, Ipc Land Pattern Name=SOT229P700X180-4, Lead Free=Yes, Manufacturer Part Number=AMS1117-3.3, Number Of Outputs=1, Octopart=https://octopart.com/ams1117-3.3-advanced+monolithic+systems-25899300, Output Type=Fixed, RoHS=TRUE, Standoff Height=0.64mm, Temperature Range High=+125°C

## Via types
v1: diameter 50, hole 11.81, Top Layer to Bottom Layer, 23 vias
v2: diameter 47.24, hole 19.68, Top Layer to Bottom Layer, 11 vias
v3: diameter 50, hole 19.68, Top Layer to Bottom Layer, 1 vias
v4: diameter 50, hole 28, Top Layer to Bottom Layer, 1 vias

## Nets (pads, with @x,y where several pads share a name; then routed paths per layer and width w, separated by ;. In a path a pad name is that pad's centre, name@x,y a point inside that pad or via, vN(x,y) a via of type N, cw(c..) or ccw(c..) an arc to the next point about the centre after c; other vN are vias at no path point)
3.31: 
3v3: C3.2 C4.1 D4.2 J2.1 J3.1 J4.1 MD1.2 P1.4 R19.1 R25.1 U1.20 U6.2 U6.4 | length 8055.7
  Top Layer w32: U1.20 1905,689 2344,1128 v1(2344,1521)
  Top Layer w35: R19.1 1046.52,1884.48 1062,1869 MD1.2
  Top Layer w50: C4.1 502,2154 528,2180 972,2180 1046.52,2105.48 1046.52,1884.48 ; 443.41,2151.44 490,2104.85 490,2004.79 487.76,2002.55 487.76,1975.5 C3.2@481.27,1969 ; C3.2 C3.2@481.27,1969 ; C3.2@502.72,1947.54 C3.2@481.27,1969 ; C3.2@502.72,1969 594.77,1969 627.41,1936.36 627.41,1900.93 D4.2 ; v1@584,1649 v1(587,1652) ; R25.1 2693.48,2136.48 v1(2698,2141)
  Top Layer w60: 183,1649 U6.2 U6.4 ; 502.72,1580.92 U6.4 ; C3.2@502.72,1947.54 U6.4 ; v1@584,1649 U6.4
  Bottom Layer w50: 217.29,1242.43 188,1213.14 188,849 247.02,789.98 ; J2.1@276.11,789.98 J2.1 ; P1.4 v1@587.5,1652 ; J4.1 J4.1@2478.91,1649.91 ; 2543.91,1649.91 2605,1711 2605,2099 2647,2141 v1(2698,2141)
  Bottom Layer w60: 217.29,1242.43 J3.1 312.88,1276.64 P1.4@586.12,1276.64 ; 247.02,789.98 J2.1@276.11,789.98 ; v1(587,1652) 587,1671 587.5,1671.5 690,1774 1908,1774 2024,1890 2172,1890 2344,1718 2344,1644 v1(2344,1521) ; 2374,1644 J4.1 ; J4.1@2478.91,1649.91 2543.91,1649.91
+12: C1.P LS1.P U5.3 U6.3 | length 5962.6
  Top Layer w80: v4(83,924) 83,1464 177.84,1558.84 U6.3
  Bottom Layer w60: 527,429 527,571.29 527,748 732,953 2510,953 2871,1314 2998,1314 3248.61,1564.61
  Bottom Layer w80: v4(83,924) 83,484 138,429 527,429 643,429 U5.3 C1.P ; 3248.61,1564.61 LS1.P
Ball_Fedder: MD1.24 U1.16 | length 980.2
  Top Layer w30: U1.16 1748,962.29 1758.71,973 MD1.24
Ball_Fedder1: 
BOOT: MD1.25 R25.2 R26.2 | length 1715.9
  Top Layer w32: v1(1871,1129) 1874.44,1132.44 1874.44,1267.28 1876.16,1269 MD1.25 MD1.25 1929.09,1268.96
  Top Layer w35: v1(2231,1660) 2381,1810 2381,1998 2454.52,2071.52 R26.2 2533,2071.52
  Top Layer w50: 2533,2071.52 R25.2
  Bottom Layer w50: v1(1871,1129) 2166.6,1129 2195.89,1158.29 2195.89,1624.89 v1(2231,1660)
Buzzer: MD1.27 R28.1 | length 1602.3
  Top Layer w35: MD1.27 2043,1369 2263,1149 v1(2263,1147)
  Top Layer w50: R28.1 2613,1775.97 2636.97,1752 v1(2660,1752)
  Bottom Layer w50: v1(2263,1147) 2268,1142 2551,1142 2698,1289 2698,1714 v1(2660,1752)
EN: MD1.3 R19.2 R21.2 | length 345.6
  Top Layer w35: R19.2 1176.69,1819.52 1177,1819.22 MD1.3@1188.5,1819.22
  Top Layer w50: R21.2 R19.2
Fwd: MD1.12 U1.4 | length 1343.2
  Top Layer w30: MD1.12 1098,1369 1033,1304 1033,934 1275,692 U1.4
Fwd1: 
GND: C1.N C2.2 C3.1 C4.2 D2.A D3.A D6.A D7.A J2.3 J3.3 J4.2 J8.1 J9.1 MD1.1 MD1.15 MD1.38 MD1.39 P1.1 Q1.3 Q2.3 Q3.3 Q4.3 Q5.3 R7.1 R13.1 R22.1 SW9.B SW12.B U1.7 U2.2 U4.2 U5.2 U6.1 | length 5.8
  Top Layer w50: C3.1@284.93,1965.57 C3.1 C3.1@289,1969.65
  other v2: 3076,333 3347,744 757,849 3189,1297 2935,1711 136,1883 723,1947 2201,1975 984,2020 3377,2147
  other v3: 428,916
GND1: 
Hall_sw1: J3.2 MD1.4 | length 1309.8
  Top Layer w35: v1(428,1144) 428,1384 813,1769 MD1.4
  Bottom Layer w60: J3.2 v1(428,1144)
Hall_sw2: J2.2 MD1.5 | length 1691.4
  Top Layer w35: v1(433,689) 498,754 498,1359 858,1719 MD1.5
  Bottom Layer w60: J2.2 v1(433,689)
In1: J6.2 MD1.29 | length 657.3
  Top Layer w35: MD1.29 2148,1469 v1(2263,1354)
  Bottom Layer w50: v1(2263,1354) 2284,1333
  Bottom Layer w60: 2284,1333 J6.2
In2: J6.3 MD1.28 | length 678
  Top Layer w35: MD1.28 2093,1419 v1(2258,1254)
  Bottom Layer w50: v1(2258,1254) 2279,1233
  Bottom Layer w60: 2279,1233 J6.3
L_Swing: MD1.11 U1.3 | length 1437.2
  Top Layer w30: MD1.11 1073,1419 978,1324 978,899 1236,641 U1.3
L_Swing1: 
Mode: MD1.14 U1.6 | length 1139.4
  Top Layer w30: 1143,1269 MD1.14 1189.02,982.98 1354,818 U1.6
Mode1: 
Motor1: MD1.8 R4.1 | length 2610.5
  Top Layer w35: v1(928,1519) 932.06,1519 982.06,1569 MD1.8
  Top Layer w50: v1(2445,1069) 2521,1069 2623,967 R4.1
  Bottom Layer w40: v1@928,1516.29 928,1259 1117,1070 2444,1070 v1(2445,1069)
Motor2: MD1.31 R18.1 | length 870.7
  Top Layer w35: MD1.31 2622.28,1569 2634,1557.28 R18.1
Motor_3: J6.1 MD1.30 | length 636.6
  Top Layer w35: MD1.30 2198,1519 2263,1454 v1(2268,1454)
  Bottom Layer w50: v1(2268,1454) 2289,1433
  Bottom Layer w60: 2289,1433 J6.1
NetD1_2: D1.2 DS1.2 J1.2 Q1.2 Q2.2
NetD2_C: D2.C Q1.1 R6.2 | length 412
  Top Layer w50: R6.2@3196,1007.13 D2.C Q1.1@3608,1007.13
NetD3_C: D3.C Q2.1 R10.2 | length 417
  Top Layer w50: R10.2@3189,622.13 D3.C Q2.1@3606,622.13
NetD4_1: D4.1 R13.2 | length 106.6
  Top Layer w50: D4.1 628,1818.93 628.59,1819.52 R13.2
NetD5_2: D5.2 DS2.2 J5.2 Q3.2 Q4.2
NetD6_C: D6.C Q3.1 R20.2 | length 486.3
  Top Layer w50: R20.2@3185.75,1638.57 3239.57,1692.4 D6.C@3317.94,1692.4 ; D6.C 3328,1690.25 3328,1714.71 3383.3,1770.01 Q3.1 Q3.1@3611,1770.01
NetD7_C: D7.C Q4.1 R27.2 | length 428
  Top Layer w50: R27.2@3182,1395.52 R27.2 Q4.1@3610,1395.52
NetDS1_1: DS1.1 R2.1 | length 126.4
  Top Layer w50: DS1.1 4181,719.17 4182.43,717.75 4182.43,611.06 R2.1
NetDS2_1: DS2.1 R17.1 | length 84.7
  Top Layer w50: DS2.1@4168,1444.77 R17.1
NetLS1_N: LS1.N Q5.1 | length 235.6
  Bottom Layer w50: LS1.N@2947.92,1971 LS1.N
  Bottom Layer w60: Q5.1 2884.56,2034.36
  Bottom Layer w80: 2884.56,2034.36 LS1.N@2947.92,1971
NetQ5_2: Q5.2 R28.2 | length 127.2
  Top Layer w50: R28.2 2613.26,1931.74 2739.74,1931.74 Q5.2
NetR1_1: R1.1 U2.4 | length 301.1
  Top Layer w50: U2.4 2823,969 2873,1019 R1.1
NetR3_2: 
NetR4_2: R4.2 U2.1 | length 458.7
  Top Layer w50: R4.2 2623,464.29 2652.29,435 2789.18,435 2818.47,464.29 2818.47,516.24 2819.06,516.83 U2.1
NetR5_2: 
NetR6_1: R6.1 R7.2 R10.1 U2.3 | length 696
  Top Layer w50: U2.3 3173.71,871.17 3203,900.45 ; R7.2@3050,688.48 R10.1 3205,898.45 3203,900.45 ; R6.1@3203,936.52 3203,900.45
NetR8_2: 
NetR9_2: 
NetR11_2: 
NetR12_2: 
NetR14_2: 
NetR15_2: 
NetR16_1: R16.1 U4.4 | length 132.8
  Top Layer w50: U4.4@2820,1536.76 R16.1
NetR18_2: R18.2 U4.1 | length 406
  Top Layer w50: R18.2 2634,1197.29 2692.29,1139 2789.18,1139 U4.1@2818.47,1168.29
NetR20_1: R20.1 R22.2 R27.1 U4.3 | length 626.5
  Top Layer w50: U4.3@2918.47,1536.17 U4.3 U4.3@2926.94,1536.17 ; R20.1 2958,1637 2927.53,1606.53 2927.53,1536.76 U4.3@2926.94,1536.17 ; R27.1@3220,1456.48 R22.2 3066.43,1458.06 3066.43,1498.61 3028.87,1536.17 U4.3@2926.94,1536.17
NetR21_1: R21.1 SW9.A | length 286.7
  Top Layer w50: R21.1 843.67,1885.11 843.67,2098.37 SW9.A 916,2099
NetR23_2: 
NetR24_2: 
NetR26_1: R26.1 SW12.A | length 171.5
  Top Layer w50: SW12.A 2331.33,2103.27 2408.27,2103.27 2441.48,2136.48 R26.1
R_Swing: MD1.13 U1.5 | length 1249.1
  Top Layer w30: MD1.13 1123,1319 1088,1284 1088,964 1314,738 U1.5
R_Swing1: 
RST: MD1.16 U1.8 | length 1006.6
  Top Layer w30: MD1.16 1358.71,912.79 1433,838.5 U1.8
RST1: 
Rx: J4.4 MD1.35 | length 670
  Top Layer w35: MD1.35 2133,1769 v1(2311,1947)
  Bottom Layer w50: v1(2311,1947) v1@2314,1944
  Bottom Layer w60: v1@2314,1944 J4.4
SCL: MD1.36 U1.19 | length 1909.2
  Top Layer w30: U1.19 1866,852 2122,1108 v1(2122,1211)
  Top Layer w35: MD1.36 v1(2095,1819)
  Bottom Layer w50: v1(2095,1819) 2122,1792 v1(2122,1211)
SCL1: 
SDA: MD1.33 U1.18 | length 1678.2
  Top Layer w30: U1.18 1826,887 2048,1109 v1(2048,1265)
  Top Layer w35: MD1.33 2028.94,1669 2043.94,1654 v1(2048,1654)
  Bottom Layer w50: v1(2048,1265) v1(2048,1654)
SDA1: 
Speed1: MD1.6 P1.3 | length 992.3
  Top Layer w35: v1(748,1179) 748,1499 918,1669 MD1.6
  Bottom Layer w50: v1@747.21,1178.21 v1(748,1179)
  Bottom Layer w60: P1.3 v1@747.21,1178.21
Speed2: MD1.7 P1.2 | length 1056.3
  Top Layer w35: v1(813,1084) 813,1479 953,1619 MD1.7
  Bottom Layer w50: v1@808.79,1079.79 v1(813,1084)
  Bottom Layer w60: P1.2 v1@808.79,1079.79
Speed_Dec: MD1.10 U1.2 | length 1539.7
  Top Layer w30: MD1.10 1033,1469 923,1359 923,869 1196,596 U1.2
Speed_Dec1: 
Speed_Inc: MD1.9 U1.1 | length 1606.7
  Top Layer w30: U1.1@1158,270.27 1158,554 873,839 873,1389 1003,1519 MD1.9
Speed_Inc1: 
Swing_Dec: MD1.23 U1.15 | length 975.1
  Top Layer w30: U1.15 MD1.23@1708,1219.08
Swing_Dec1: 
Swing_Inc: MD1.26 U1.17 | length 1234.3
  Top Layer w30: U1.17 1787,938 1988,1139 1988,1260.97 1932.68,1316.28 1880.72,1316.28 MD1.26
Swing_Inc1: 
Tx: J4.3 MD1.34 | length 646.8
  Top Layer w35: MD1.34 2200,1719 v1(2324,1843)
  Bottom Layer w60: v1(2324,1843) 2325,1844 J4.3
VCC: C2.1 D1.1 D5.1 J1.1 J5.1 J8.2 L1.2 R1.2 R2.2 R16.2 R17.2 U5.1 | length 1000
  Top Layer w50: R16.2 2766.48,1734.48 2737,1705 2737,1410 2845,1302 2982,1302 3071,1213 v1(3071,1165) 3070.48,1164.48 R1.2
Vin: J9.2 L1.1
pads on no net: MD1.17 MD1.18 MD1.19 MD1.20 MD1.21 MD1.22 MD1.32 MD1.37 U1.9 U1.10 U1.11 U1.12 U1.13 U1.14 U1.21 U1.22
copper on no net: | length 6679
  Top Layer w0.98: 211.58,136 ccw(c123,136) 211.58,136 ; 211.58,2076 ccw(c123,2076) 211.58,2076 ; 2871.58,310 ccw(c2783,310) 2871.58,310 ; 4327.58,1767 ccw(c4239,1767) 4327.58,1767 ; 4666.58,137 ccw(c4578,137) 4666.58,137
  Top Layer w1: 4668.58,2072 ccw(c4580,2072) 4668.58,2072
  Bottom Layer w0.98: 211.58,136 ccw(c123,136) 211.58,136 ; 211.58,2077 ccw(c123,2077) 211.58,2077 ; 2871.58,310 ccw(c2783,310) 2871.58,310 ; 4327.58,1767 ccw(c4239,1767) 4327.58,1767 ; 4666.58,137 ccw(c4578,137) 4666.58,137 ; 4668.58,2072 ccw(c4580,2072) 4668.58,2072
  other v2: 1100,2174

## Polygon pours and split planes (outlines as drawn)
GND on Bottom Layer "GND_L02_P016" (solid, remove dead copper, pour order 16): 198,-1 4503,-1 ccw(c4503,199) 4703,199 4703,2019 ccw(c4503,2019) 4503,2219 198,2219 ccw(c198,2019) -2,2019 -2,199 ccw(c198,199)
NetD5_2 on Bottom Layer "NETD5_2_L02_P006" (solid, remove dead copper, pour order 6): 3450,2102 3450,1232 4577,1232 4577,1484 4164.45,1484 4164.45,2102
VCC on Bottom Layer "VCC_L02_P008" (solid, remove dead copper, pour order 8): 4189,1222.16 2835,1222.16 2835,912 2400.31,912 1499,912 947,912 792,757 797,593 584,593 584,494.51 792,494.51 792,167 1010,167 1010,494.51 1077.72,563.33 1941,577.26 2402.8,577.26 2403,559.5 3290.5,559.5 3290.5,961 4189,961 4180.91,113 4582,113 ccw(c4582,234) 4703,234 4703,1987 ccw(c4582.68,1983.16) 4665,2071 ccw(c4584.01,1991.55) 4585,2105 4189,2105
Vin on Bottom Layer "VIN_L02_P000" (solid, remove dead copper, pour order 0): 1655,505 1655,110 2359,110 2359,505
NetD1_2 on Bottom Layer "NETD1_2_L02_P007" (solid, remove dead copper, pour order 7): 3403,133 3403,953 4591,953 4591,667 4119.44,667 4119.44,133
GND on Top Layer "GND_L01_P014" (solid, pour order 14): 198,-1 4503,-1 ccw(c4503,199) 4703,199 4703,2019 ccw(c4503,2019) 4503,2219 198,2219 ccw(c198,2019) -2,2019 -2,199 ccw(c198,199)
VCC on Top Layer "VCC_L01_P003" (solid, remove dead copper, pour order 3): 4117,571 4117,106 4375,106 4375,572 4381,572
VCC on Top Layer "VCC_L01_P004" (solid, remove dead copper, pour order 4): 4255,2163 4255,1776 4124,1776 4124,1574 4452,1574 4452,2163
NetD1_2 on Top Layer "NETD1_2_L01_P002" (solid, remove dead copper, pour order 2): 3661,1056 3658,1056 3658,374 3404,374 3404,144 4064,144 4064,779 4286,779 4286,1056
NetD5_2 on Top Layer "NETD5_2_L01_P001" (solid, remove dead copper, pour order 1): 3664,1145 3664,1855 3453,1855 3453,2101 4198,2101 4198,1837 4088,1837 4088,1406 4272,1406 4272,1145

## Silkscreen, mask and mechanical layers (free items; w line width, h text height)
Mechanical 1:
  circle w0.51: c122,2073 r59.06
  circle w0.51: c122,137.02 r59.06
  circle w0.5: c2782.65,310.65 r59.06
  circle w0.55: c4580.02,136 r59.06
  circle w0.5: c4239.35,1767.35 r59.06
  circle w0.51: c4580,2072 r59.06
Top 3D Body:
  circle w0.25: c2664.54,1885.46 r0.12
  circle w0.25: c3511,1039 r0.12
  circle w0.25: c4357.46,192.54 r0.12
  circle w0.25: c4357.46,1885.46 r0.12
  lines w0.5: 2664.54,310.65 ccw(c2782.65,310.65) 2782.65,192.54 4239.35,192.54 ccw(c4239.35,310.65) 4357.46,310.65 4357.46,1767.35 ccw(c4239.35,1767.35) 4239.35,1885.46 2782.65,1885.46 ccw(c2782.65,1767.35) 2664.54,1767.35 2664.54,310.65

## Text inside footprints (layer, text, board x,y; h text height)
LS1: Top Overlay "-" at 2839.45,1993.47 h50.07 r180